# Altium PCB PCB1.PcbDoc
Units mm, origin at the board's own origin, x right, y up, seen from the top; angles counter-clockwise.
Board outline 70.5 x 36.57 mm, 2 copper layers (Top Layer, Bottom Layer); 21 components, 25 nets, 71 pads, 2 vias.
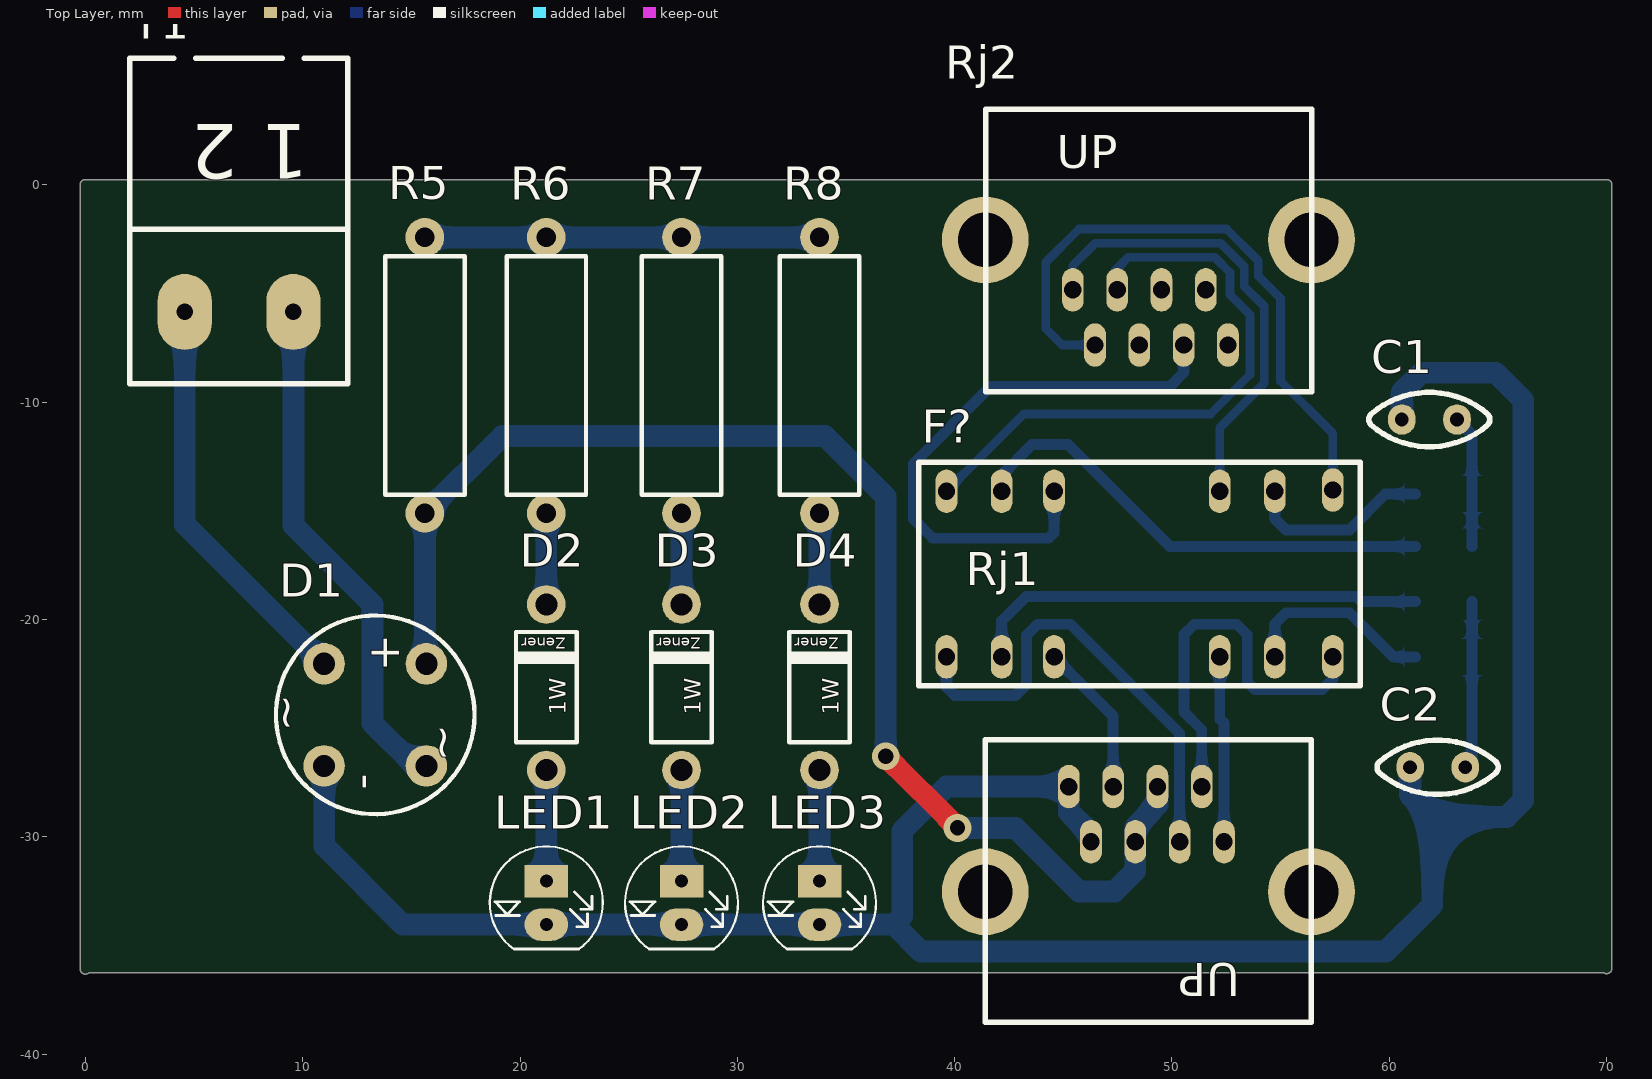
[diagram p0: Top Layer view]
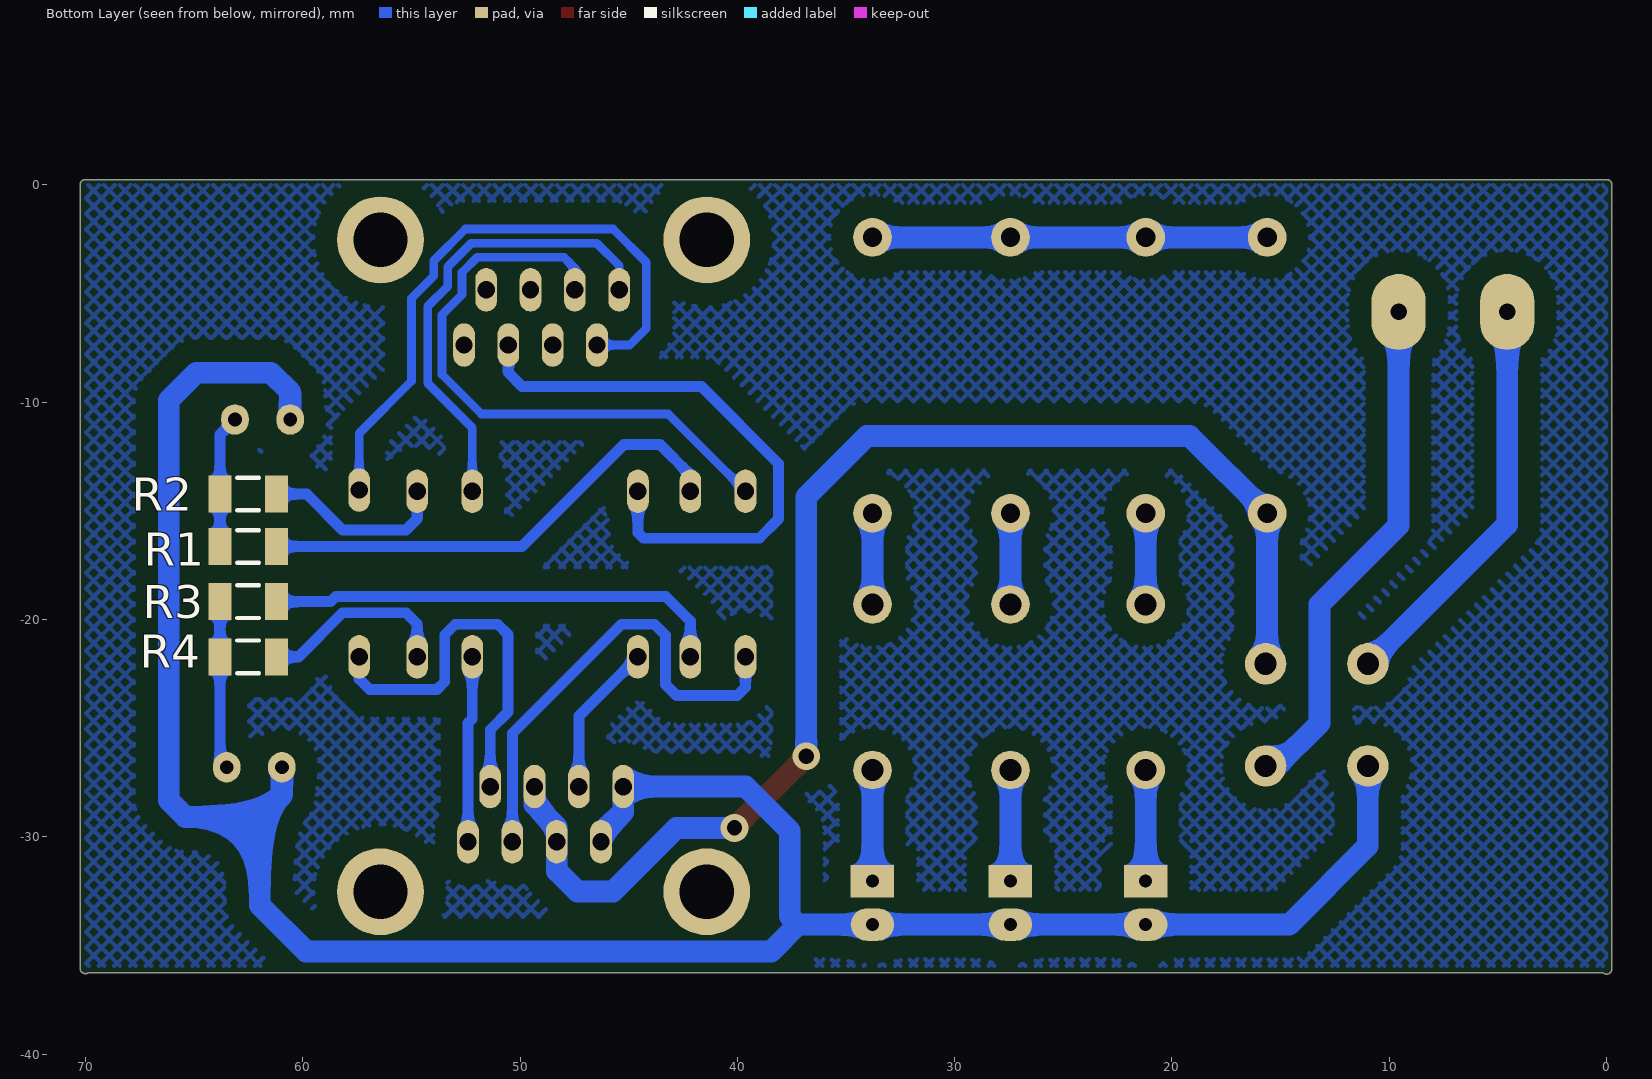
[diagram p1: Bottom Layer view, seen from below]
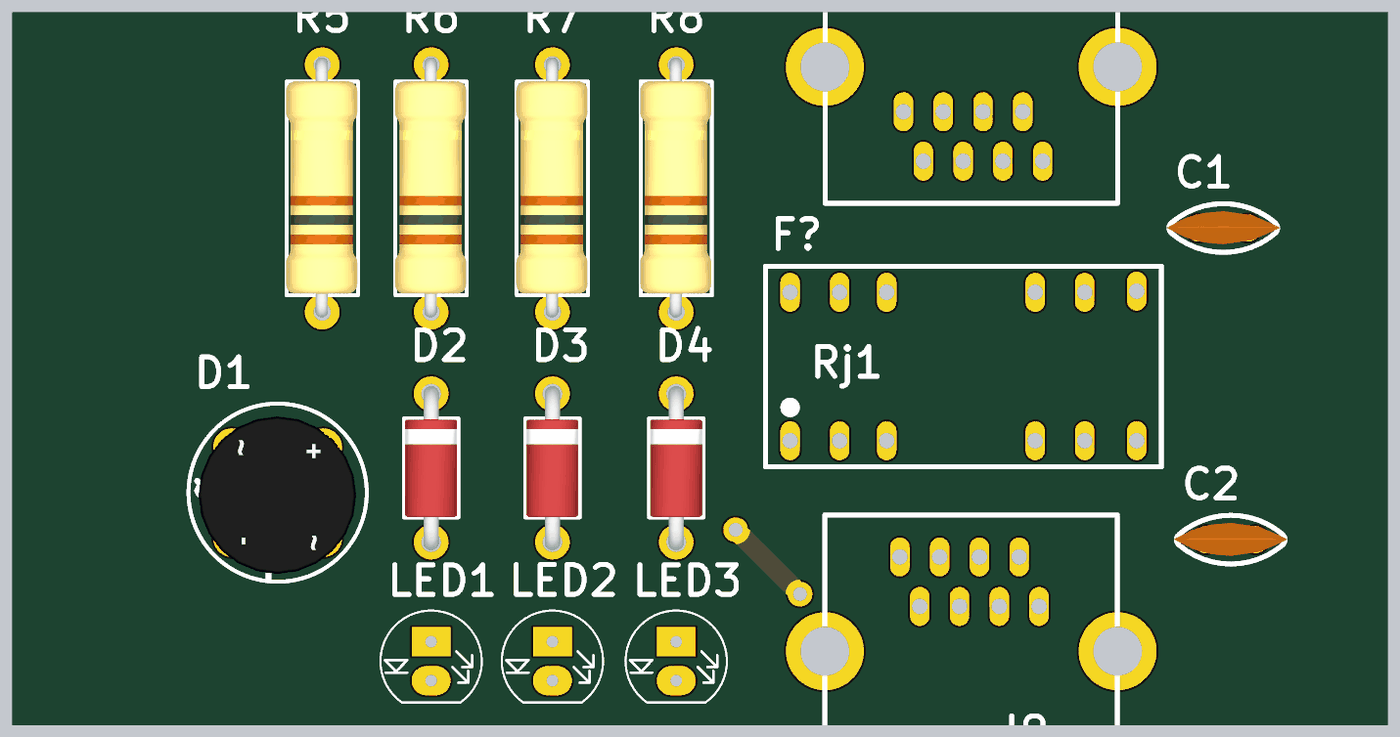
[diagram p2: 3D render of the assembled board from above, using the file's embedded part models]
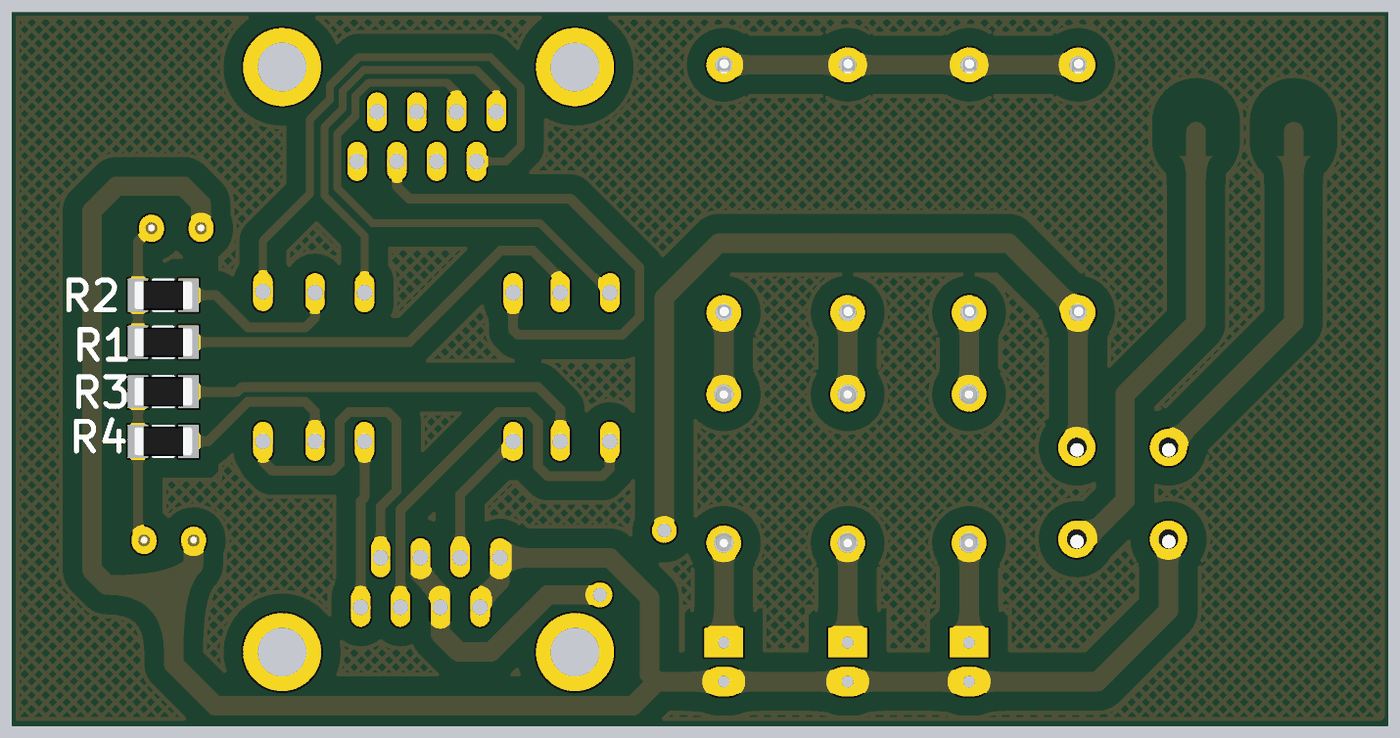
[diagram p3: 3D render of the assembled board from below, using the file's embedded part models]

## Layer stack, top to bottom
Top Solder: solder mask 0.0102, Solder Resist, Dk 3.5
Top Layer: signal copper 0.0356
Dielectric 1: dielectric 0.32, FR-4, Dk 4.8
Bottom Layer: signal copper 0.0356
Bottom Solder: solder mask 0.0102, Solder Resist, Dk 3.5

## Board outline
-0.25,-36.068 -0.25,0 cw(c0,0) 0,0.25 70,0.25 cw(c70,0) 70.25,0 70.25,-36.045 cw(c70,-36.045) 69.857,-36.25 0.172,-36.25 cw(c0,-36.068)

## Design rules (kind name [scope] priority, off if disabled: settings)
Clearance [All] p1: gap=0.25 ignorepadtopadclearanceinfootprint=FALSE
PolygonConnect [All] p1: connectstyle=Relief reliefconductorwidth=0.254 reliefentries=4 polygonreliefangle="90 Angle" airgapwidth=0.254
RoutingVias [All] p1: holewidth=0.711 width=1.27 viastyle="Through Hole" minholewidth=0.711 minwidth=1.27 maxholewidth=0.711 maxwidth=1.27
SolderMaskExpansion [All] p1: expansion=0.102
Width [All] p1: maxlimit=3 minlimit=0.254 preferedwidth=1.5
30 further rules are at their usual default settings.

## Components (designator, comment, footprint, x,y, rotation, side; value= is the part's Value field where it differs from the comment)
C1 "100nF" "Cap - 100nF" 61.849,-10.795 r180 top
C2 "100nF" "Cap - 100nF" 62.23,-26.797 r180 top
D1 "Diode Bridge" Bridge 13.335,-24.384 r270 top
D2 "Diode Zener" "Diode 1W" 21.209,-23.114 r90 top
D3 "Diode Zener" "Diode 1W" 27.432,-23.114 r90 top
D4 "Diode Zener" "Diode 1W" 33.782,-23.114 r90 top
F? "20F001N" 20F001N-YCl 38.354,-23.057 r0 top
LED1 "Red" LED-5mm 21.209,-32.036 r270 top
LED2 "Red" LED-5mm 27.432,-32.036 r270 top
LED3 "Red" LED-5mm 33.782,-32.036 r270 top
R1 "75R" "RES 1206 (3216X08L)" 63.81,-16.637 r180 bottom
R2 "75R" "RES 1206 (3216X08L)" 63.81,-14.224 r180 bottom
R3 "75R" "RES 1206 (3216X08L)" 61.214,-19.177 r0 bottom
R4 "75R" "RES 1206 (3216X08L)" 61.214,-21.717 r0 bottom
R5 "0.56R" Res-(1/1) 15.621,-15.113 r90 top
R6 "100R" Res-(1/1) 21.209,-15.113 r90 top
R7 "220R" Res-(1/1) 27.432,-15.113 r90 top
R8 "220R" Res-(1/1) 33.782,-15.113 r90 top
Rj1 "RJ45-w57-1" rj45-w57-1 52.394,-30.226 r180 top
Rj2 "RJ45-w57-1" rj45-w57-1 45.438,-4.826 r0 top
T1 "Phoenix terminal" "phoenix terminal 2" 12.065,5.842 r180 top

## Footprints (in the part's own frame and the unit in brackets; to place one, negate y for a bottom-side part, rotate by r counter-clockwise, add the part's x,y. Pads: shape width x height; smd on the part's side, far side on the other; paste and mask are expansions set on the pad)
20F001N-YCl [mm]
  oval 1x2 hole 0.8: 1(1.27,1.34) 2(3.81,1.34) 3(6.223,1.34) 6(13.843,1.34) 7(16.383,1.34) 8(19.05,1.34) 9(19.05,9.017) 10(16.383,8.96) 11(13.843,8.96) 14(6.223,8.96) 15(3.81,8.96) 16(1.27,8.96)
  round 1 on Top Overlay: 17(1.27,3.048)
  silkscreen extent 0,0 20.32,10.3
Bridge [mm]
  round 1.905 hole 1.016: 1(-2.35,2.35) 2(-2.35,-2.35) 3(2.35,-2.35) 4(2.35,2.35)
  silkscreen extent -4.57,-4.57 4.57,4.57, body extent -3.92,-4.06 4.18,4.04, height 5.21
"Cap - 100nF" [mil]
  oval 50x55 hole 25: 1(-50,0) 2(50,0)
  silkscreen extent -110,-49 110,49, body extent -115,-34 115,33, height 272
"Diode 1W" [mil]
  round 70 hole 40: 1(-150,0) 2(150,0)
  silkscreen extent -100,-55 100,55, body extent -166,-53 165,53, height 131
LED-5mm [mm]
  rect 1.5x2 hole 0.6: 1(0,0)
  oval 1.5x2 hole 0.6: 2(2,0)
  silkscreen extent -1.6,-2.6 3.13,2.6
"phoenix terminal 2" [mil] "2 terminals"
  oval 98.43x137.8 hole 30: 1(98.15,460) 2(295,460)
  silkscreen extent 0,0 395,591
"RES 1206 (3216X08L)" [mm] "Chip Resistor, 2-Leads, Body 3.2x1.6mm, IPC High Density _ (0.125 W)"
  rect 1.05x1.7 smd: 1(0,0) 2(2.596,0)
  silkscreen extent 0.8,-0.75 1.8,0.75, body extent -0.23,-0.76 2.82,0.76, height 0.6
Res-(1/1) [mil]
  round 70 hole 35: 1(0,0) 2(500,0)
  silkscreen extent 34,-72 466,72, body extent -11,-71 514,73, height 151
rj45-w57-1 [mm]
  oval 1x2 hole 0.8: 1(0,0) 2(1.02,-2.54) 3(2.04,0) 4(3.06,-2.54) 5(4.08,0) 6(5.1,-2.54) 7(6.12,0) 8(7.14,-2.54)
  round 4 hole 2.5: 9(-4.03,2.3) 10(10.986,2.3)
  silkscreen extent -4.01,-4.7 10.99,8.3

## Part data
C1 C2: library part Cap-Bipolar, "Bipolar Capacitor", Voltage=100V, Adding Date=1387/12/20, Designer="Saeid Jorablo", Organazation=ControTec
D1: "Full Wave Diode Bridge", Company=E.P.I.L, Design Date=2011/11/02
D2: "Zener Diode", Voltage=10V, Company=E.P.I.L, Design Date=2011/11/02, Designer="Saeid Jorablo"
D3: "Zener Diode", Voltage=20V, Company=E.P.I.L, Design Date=2011/11/02, Designer="Saeid Jorablo"
D4: "Zener Diode", Voltage=36V, Company=E.P.I.L, Design Date=2011/11/02, Designer="Saeid Jorablo"
F?: library part 20F001N-YCL
LED1 LED2 LED3: library part LED, "LED", Adding Date=1387/12/22, Color=Red, Designer="Saeid Jorablo", Organazation=ControTec, Size="SMD 1206"
R1 R2 R3 R4 R5 R6 R7 R8: library part Resistor, "Resistor", Power="1/8 W", Tolerance=5%
T1: library part "Phoenix terminal 2", "Terminal 2 Pin", ComponentLinkURL=www.picpars.com, Designer="Seyed Mohsen Ghasemain", E-mail=picpars@gmail.com

## Via types
v1: diameter 1.27, hole 0.711, Top Layer to Bottom Layer, 2 vias

## Nets (pads, with @x,y where several pads share a name; then routed paths per layer and width w, separated by ;. In a path a pad name is that pad's centre, name@x,y a point inside that pad or via, vN(x,y) a via of type N, cw(c..) or ccw(c..) an arc to the next point about the centre after c; other vN are vias at no path point)
GND: C1.2 C2.2 D1.3 LED1.2 LED2.2 LED3.2 Rj1.7 Rj1.8 | length 110.1
  Bottom Layer w1: D1.3 10.985,-30.416 14.605,-34.036 LED1.2 LED2.2 LED3.2 ; LED3.2@34.671,-34.036 37.211,-34.036 ; Rj1.7 46.274,-29.891 45.254,-28.871 Rj1.8 39.624,-27.686 37.592,-29.718 37.592,-33.655 37.211,-34.036 ; C1.2 60.579,-9.525 61.468,-8.636 64.897,-8.636 66.167,-9.906 66.167,-28.321 65.405,-29.083 61.976,-29.083 ; C2.2 60.96,-28.067 61.976,-29.083 ; 37.211,-34.036 38.451,-35.276 59.847,-35.276 61.976,-33.147 61.976,-29.083
NetC1_1: C1.1 R1.1 R2.1 | length 6.1
  Bottom Layer w0.5: C1.1 63.81,-11.486 R2.1 R1.1
NetC2_1: C2.1 R3.2 R4.2 | length 7.7
  Bottom Layer w0.5: C2.1 63.81,-26.487 R4.2 R3.2
NetD1_2: D1.2 T1.2 | length 18.8
  Bottom Layer w1: T1.2 4.572,-15.621 D1.2
NetD1_4: D1.4 T1.1 | length 23.7
  Bottom Layer w1: T1.1 9.572,-15.668 13.208,-19.304 13.208,-24.765 15.177,-26.734 D1.4
NetD2_1: D2.1 LED1.1 | length 5.1
  Bottom Layer w1: LED1.1 D2.1
NetD2_2: D2.2 R6.1 | length 4.2
  Bottom Layer w1: D2.2 R6.1
NetD3_1: D3.1 LED2.1 | length 5.1
  Bottom Layer w1: LED2.1 D3.1
NetD3_2: D3.2 R7.1 | length 4.2
  Bottom Layer w1: D3.2 R7.1
NetD4_1: D4.1 LED3.1 | length 5.1
  Bottom Layer w1: LED3.1 D4.1
NetD4_2: D4.2 R8.1 | length 4.2
  Bottom Layer w1: D4.2 R8.1
NetF?_2: F?.2 R3.1 | length 21.3
  Bottom Layer w0.5: F?.2 42.164,-20.066 43.295,-18.935 58.477,-18.935 58.719,-19.177 R3.1
NetF?_7: F?.7 R4.1 | length 9.1
  Bottom Layer w0.5: F?.7 54.737,-20.193 55.245,-19.685 58.166,-19.685 60.198,-21.717 R4.1
NetF?_10: F?.10 R2.2 | length 8.6
  Bottom Layer w0.5: F?.10 54.737,-15.367 55.245,-15.875 58.166,-15.875 59.817,-14.224 R2.2
NetF?_15: F?.15 R1.2 | length 22.3
  Bottom Layer w0.5: F?.15 42.164,-13.335 43.561,-11.938 45.212,-11.938 49.911,-16.637 R1.2
NetR5_2: R5.2 R6.2 R7.2 R8.2 | length 18.2
  Bottom Layer w1: R5.2 R6.2 R7.2 R8.2
RX+: F?.1 Rj1.3 | length 22
  Bottom Layer w0.5: F?.1 39.624,-23.114 40.005,-23.495 42.799,-23.495 43.307,-22.987 43.307,-20.725 43.815,-20.217 45.339,-20.217 50.354,-25.232 Rj1.3
RX+in: F?.16 Rj2.3 | length 28
  Bottom Layer w0.4: F?.16 43.18,-10.541 51.771,-10.541 53.594,-8.718 53.594,-5.969 52.674,-5.049 52.674,-4.028 51.972,-3.326 47.982,-3.326 47.478,-3.83 Rj2.3
RX-: F?.3 Rj1.6 | length 7.1
  Bottom Layer w0.5: F?.3 47.294,-24.434 Rj1.6
RX-in: F?.14 Rj2.6 | length 26.8
  Bottom Layer w0.5: F?.14 44.577,-16.002 44.323,-16.256 38.989,-16.256 38.1,-15.367 38.1,-12.827 41.656,-9.271 49.911,-9.271 50.538,-8.644 Rj2.6
TX+: F?.6 Rj1.1 | length 8.6
  Bottom Layer w0.5: F?.6 52.197,-24.568 52.394,-24.765 Rj1.1
TX+in: F?.11 Rj2.1 | length 21.4
  Bottom Layer w0.4: Rj2.1 45.438,-3.711 46.473,-2.676 52.241,-2.676 53.324,-3.759 53.324,-4.668 54.244,-5.588 54.244,-9.129 52.197,-11.176 F?.11
TX-: F?.8 Rj1.2 | length 18.1
  Bottom Layer w0.5: Rj1.2 51.374,-25.069 50.562,-24.257 50.562,-20.685 51.03,-20.217 52.983,-20.217 53.467,-20.701 53.467,-22.86 53.824,-23.217 56.92,-23.217 57.404,-22.733 F?.8
TX-in: F?.9 Rj2.2 | length 28.6
  Bottom Layer w0.4: Rj2.2 44.958,-7.366 44.196,-6.604 44.196,-3.556 45.726,-2.026 52.511,-2.026 53.974,-3.489 53.974,-4.187 54.994,-5.207 54.994,-9.02 57.404,-11.43 F?.9
VCC: D1.1 R5.1 Rj1.4 Rj1.5 | length 61.5
  Top Layer w1: v1(36.83,-26.289) v1(40.132,-29.591)
  Bottom Layer w1: D1.1@15.431,-22.034 15.621,-21.844 R5.1 19.177,-11.557 34.036,-11.557 36.83,-14.351 v1(36.83,-26.289) ; v1(40.132,-29.591) 42.799,-29.591 45.72,-32.512 47.371,-32.512 48.314,-31.569 Rj1.5 48.314,-29.537 49.334,-28.517 Rj1.4
pads on no net: F?.17 Rj1.9 Rj1.10 Rj2.4 Rj2.5 Rj2.7 Rj2.8 Rj2.9 Rj2.10

## Polygon pours and split planes (outlines as drawn)
no net on Bottom Layer "Bottom Layer-No Net" (hatched 45Degree grid 0.508 track 0.203, pour order 0): 69.977,0 69.977,-35.941 0.127,-35.941 0,-35.814 0,0

## Silkscreen, mask and mechanical layers (free items; w line width, h text height)
Mechanical 1:
  lines w0.5: 0,-36.068 0,0 70,0 70,-36.045 ; 0,-36 70,-36

## Text inside footprints (layer, text, board x,y; h text height)
D1: Top Overlay "~" at 15.824,-24.816 h1.5 r270; Top Overlay "~" at 8.621,-23.442 h1.5 r270; Top Overlay "+" at 13.183,-20.686 h1.5 r270; Top Overlay "-" at 12.281,-27.107 h1.5 r270
D2: Top Overlay "Zener" at 22.098,-20.828 h0.5 r180; Top Overlay "1W" at 22.098,-24.384 h0.76 r90
D3: Top Overlay "Zener" at 28.321,-20.828 h0.5 r180; Top Overlay "1W" at 28.321,-24.384 h0.76 r90
D4: Top Overlay "Zener" at 34.671,-20.828 h0.5 r180; Top Overlay "1W" at 34.671,-24.384 h0.76 r90
Rj1: Top Overlay "UP" at 53.122,-35.828 h1.52 r180
Rj2: Top Overlay "UP" at 44.71,0.776 h1.52
T1: Top Overlay "1 2" at 10.287,2.794 h2.5 r180